# EAGLE board shift (EAGLE 5.06)
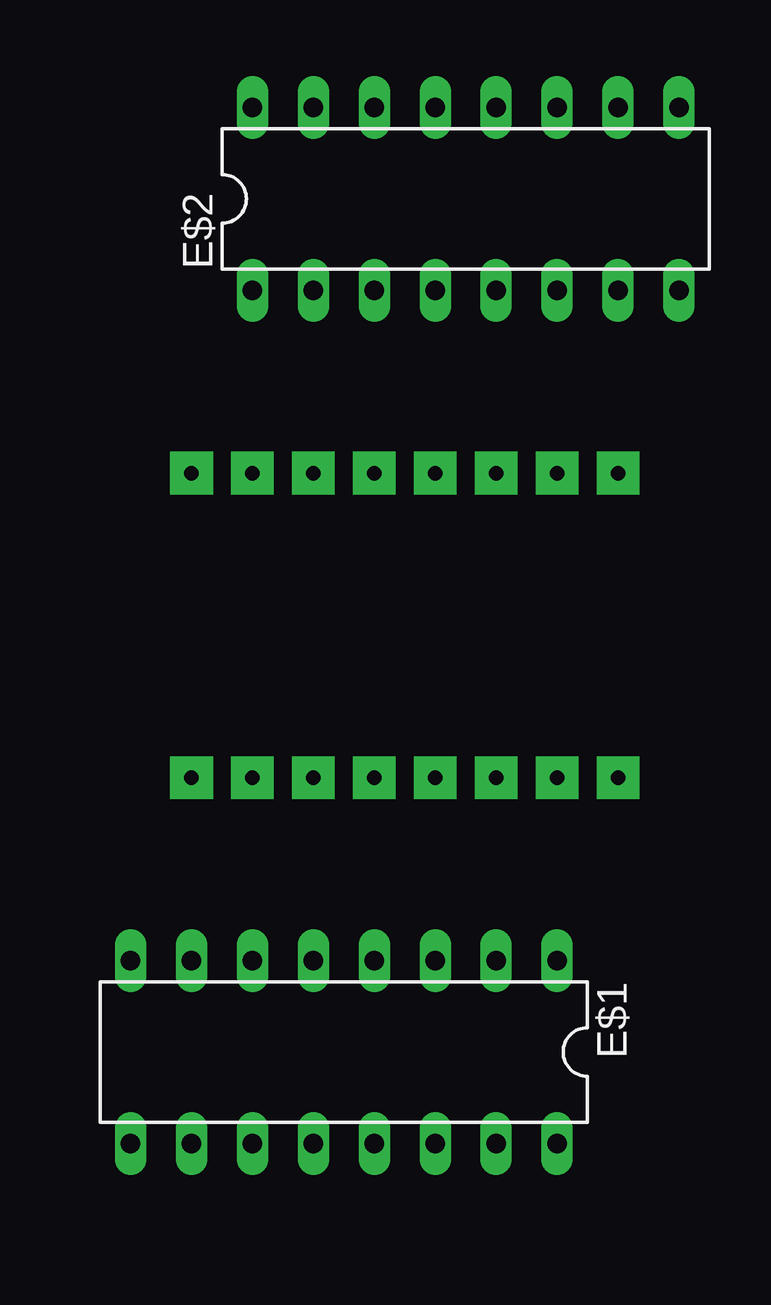
[diagram p0: board, top side]
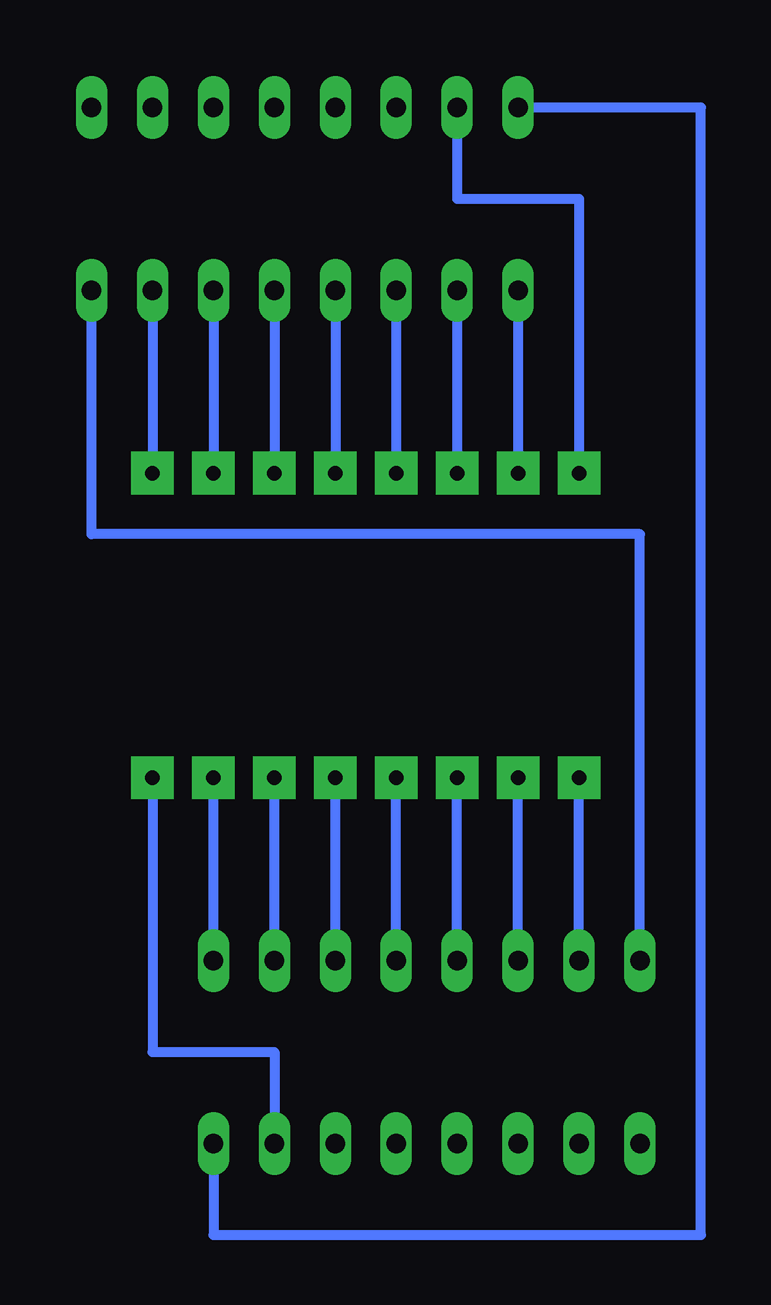
[diagram p1: board, bottom side, seen from below]

No outline drawn. Coordinates in mm, seen from the top.
Copper layers (1*16): Top 0.035mm / dielectric 1.5mm / Bottom 0.035mm
Design rules "default": minimum track width 10mil, minimum drill 24mil, track to track 8mil, track to pad 8mil, pad to pad 8mil, via to via 8mil, smd to smd 8mil, copper to edge 40mil, drill to drill 8mil, minimum pad ring 10mil, minimum via ring 8mil, stop-mask expansion 4mil, vias tented up to drill 0mil, thermal gap 10mil

## Footprints (pad centres in the part's own frame; a part is rotated, then mirrored left to right if it is on the bottom)
DIL16 = drill 0.813 long: 1 -8.89,-3.81; 2 -6.35,-3.81; 3 -3.81,-3.81; 4 -1.27,-3.81; 5 1.27,-3.81; 6 3.81,-3.81; 7 6.35,-3.81; 8 8.89,-3.81; 9 8.89,3.81; 10 6.35,3.81; 11 3.81,3.81; 12 1.27,3.81; 13 -1.27,3.81; 14 -3.81,3.81; 15 -6.35,3.81; 16 -8.89,3.81

## Placement (x,y rotation side)
E$1  [DIL16]  21.59,6.35 180 top
E$2  [DIL16]  26.67,41.91 0 top

## Library data of the parts
E$1 E$2 = 40xx

## Nets
S$1: E$1.7
S$2: E$1.6
S$3: E$1.5
S$4: E$1.4
S$5: E$1.3
S$6: E$1.2
S$7: E$1.1
S$8: E$1.15
S$9: E$2.15
S$10: E$2.1
S$11: E$2.2
S$12: E$2.3
S$13: E$2.4
S$14: E$2.5
S$15: E$2.6
S$16: E$1.8 E$2.8
S$18: E$2.7
S$19: E$1.16 E$2.16

## Tracks (layer width: path | path; a pad name or v marks a point on that pad's centre or on a via)
S$1  (via drill 0.6 pad 1.78)
  Bottom 0.406: E$1.7 v15.24,17.78
S$2  (via drill 0.6 pad 1.78)
  Bottom 0.406: E$1.6 v17.78,17.78
S$3  (via drill 0.6 pad 1.78)
  Bottom 0.406: E$1.5 v20.32,17.78
S$4  (via drill 0.6 pad 1.78)
  Bottom 0.406: E$1.4 v22.86,17.78
S$5  (via drill 0.6 pad 1.78)
  Bottom 0.406: E$1.3 v25.4,17.78
S$6  (via drill 0.6 pad 1.78)
  Bottom 0.406: E$1.2 v27.94,17.78
S$7  (via drill 0.6 pad 1.78)
  Bottom 0.406: E$1.1 v30.48,17.78
S$8  (via drill 0.6 pad 1.78)
  Bottom 0.406: v33.02,17.78 33.02,6.35 27.94,6.35 E$1.15
S$9  (via drill 0.6 pad 1.78)
  Bottom 0.406: E$2.15 20.32,41.91 15.24,41.91 v15.24,30.48
S$10  (via drill 0.6 pad 1.78)
  Bottom 0.406: E$2.1 v17.78,30.48
S$11  (via drill 0.6 pad 1.78)
  Bottom 0.406: E$2.2 v20.32,30.48
S$12  (via drill 0.6 pad 1.78)
  Bottom 0.406: E$2.3 v22.86,30.48
S$13  (via drill 0.6 pad 1.78)
  Bottom 0.406: E$2.4 v25.4,30.48
S$14  (via drill 0.6 pad 1.78)
  Bottom 0.406: E$2.5 v27.94,30.48
S$15  (via drill 0.6 pad 1.78)
  Bottom 0.406: E$2.6 v30.48,30.48
S$16
  Bottom 0.406: E$1.8 12.7,27.94 35.56,27.94 E$2.8
S$18  (via drill 0.6 pad 1.78)
  Bottom 0.406: E$2.7 v33.02,30.48
S$19
  Bottom 0.406: E$1.16 30.48,-1.27 10.16,-1.27 10.16,45.72 E$2.16